# Altium PCB F103RBT6.PcbDoc
Units mil, origin at the board's own origin, x right, y up, seen from the top; angles counter-clockwise.
Board outline 1759 x 1760 mil, 2 copper layers (Top Layer, Bottom Layer); 21 components, 0 nets, 173 pads, 0 vias.
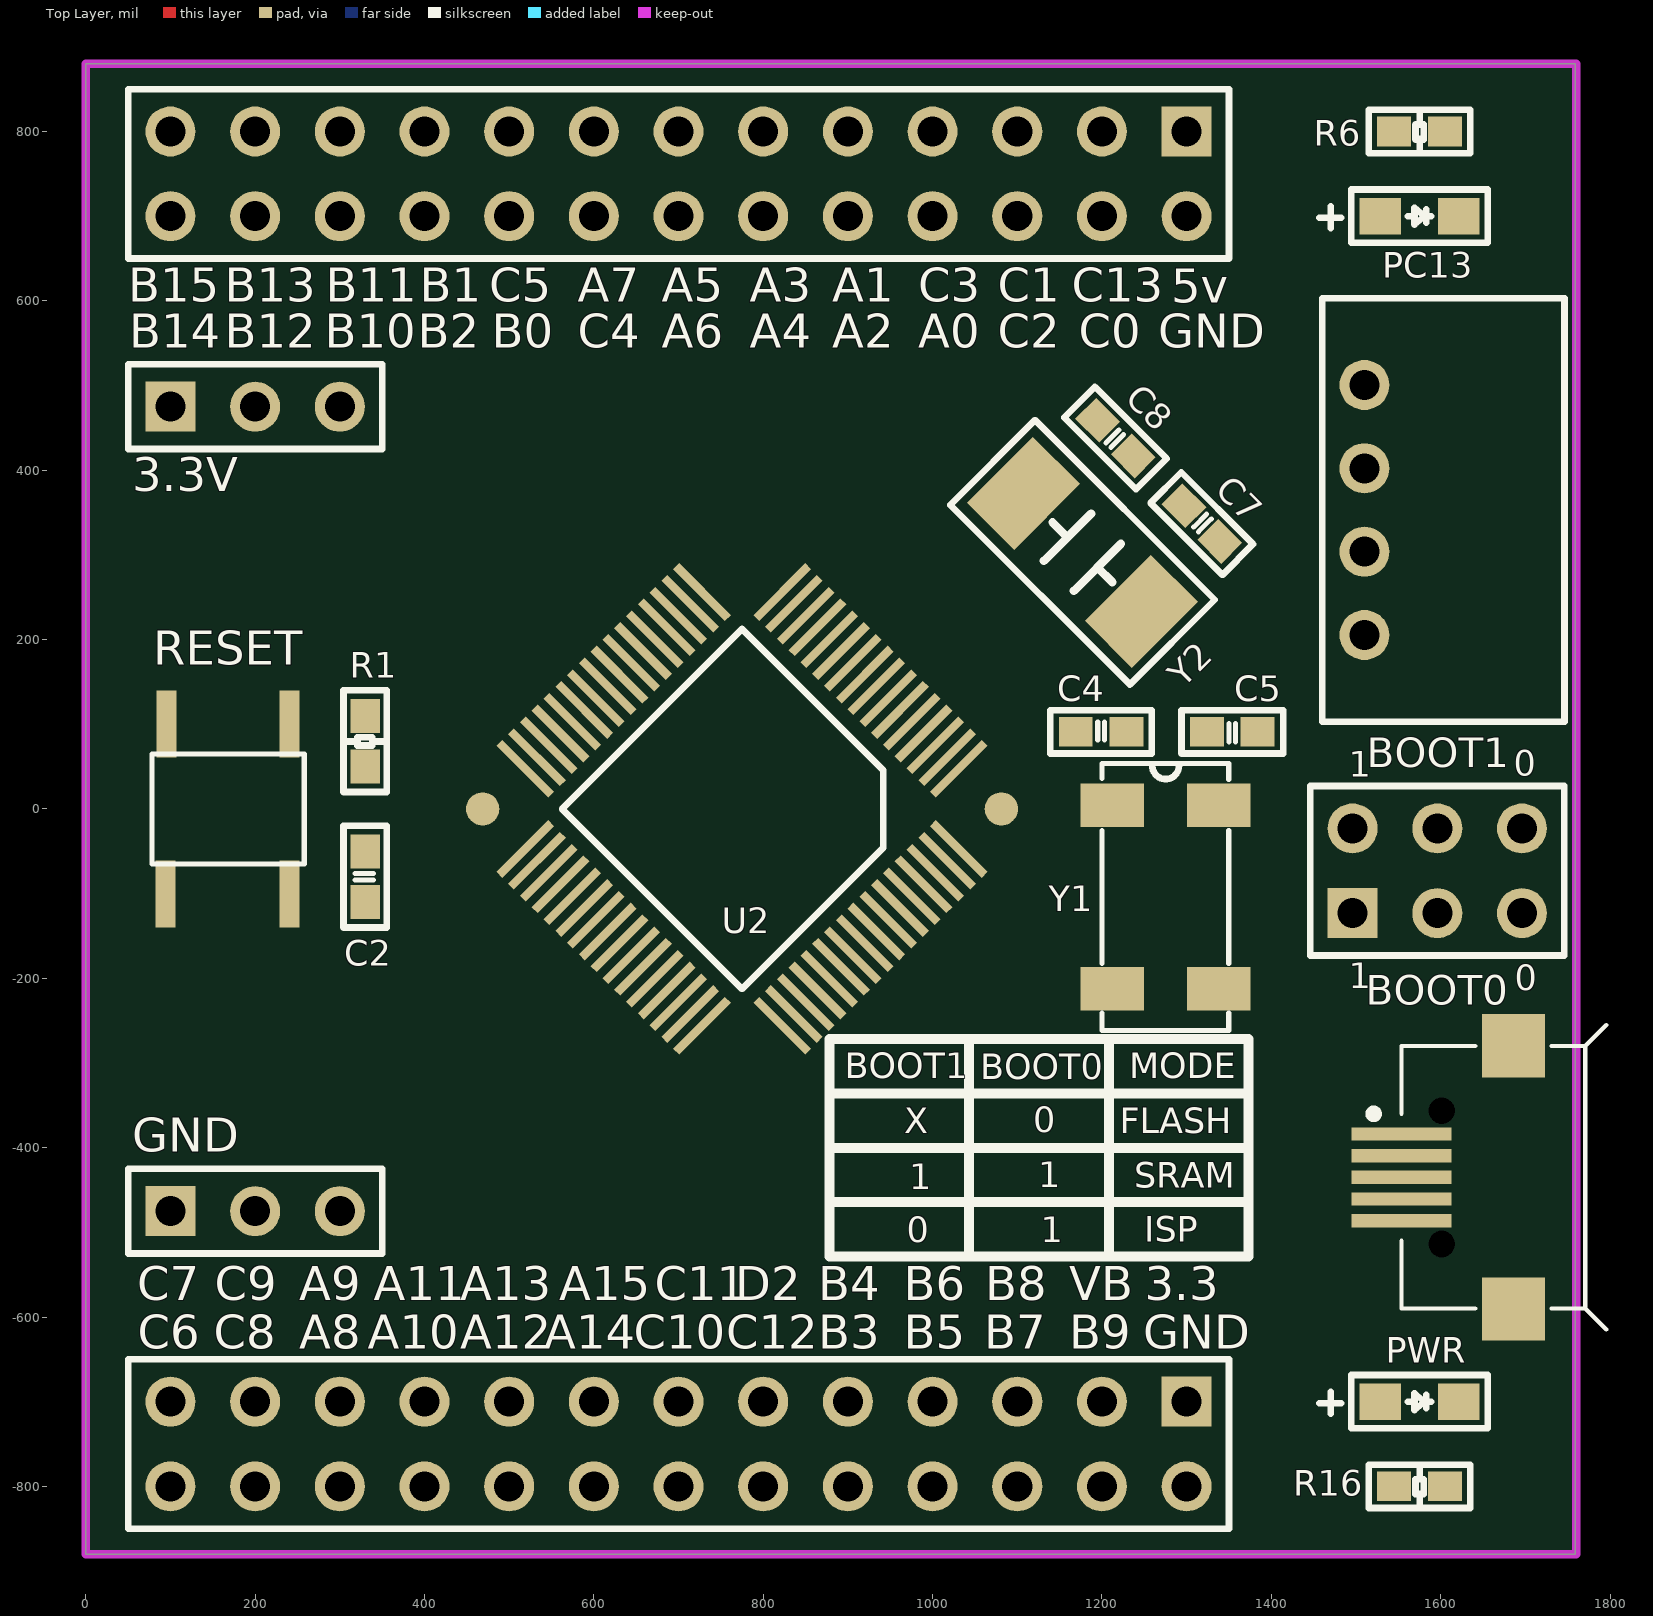
[diagram p0: Top Layer view]
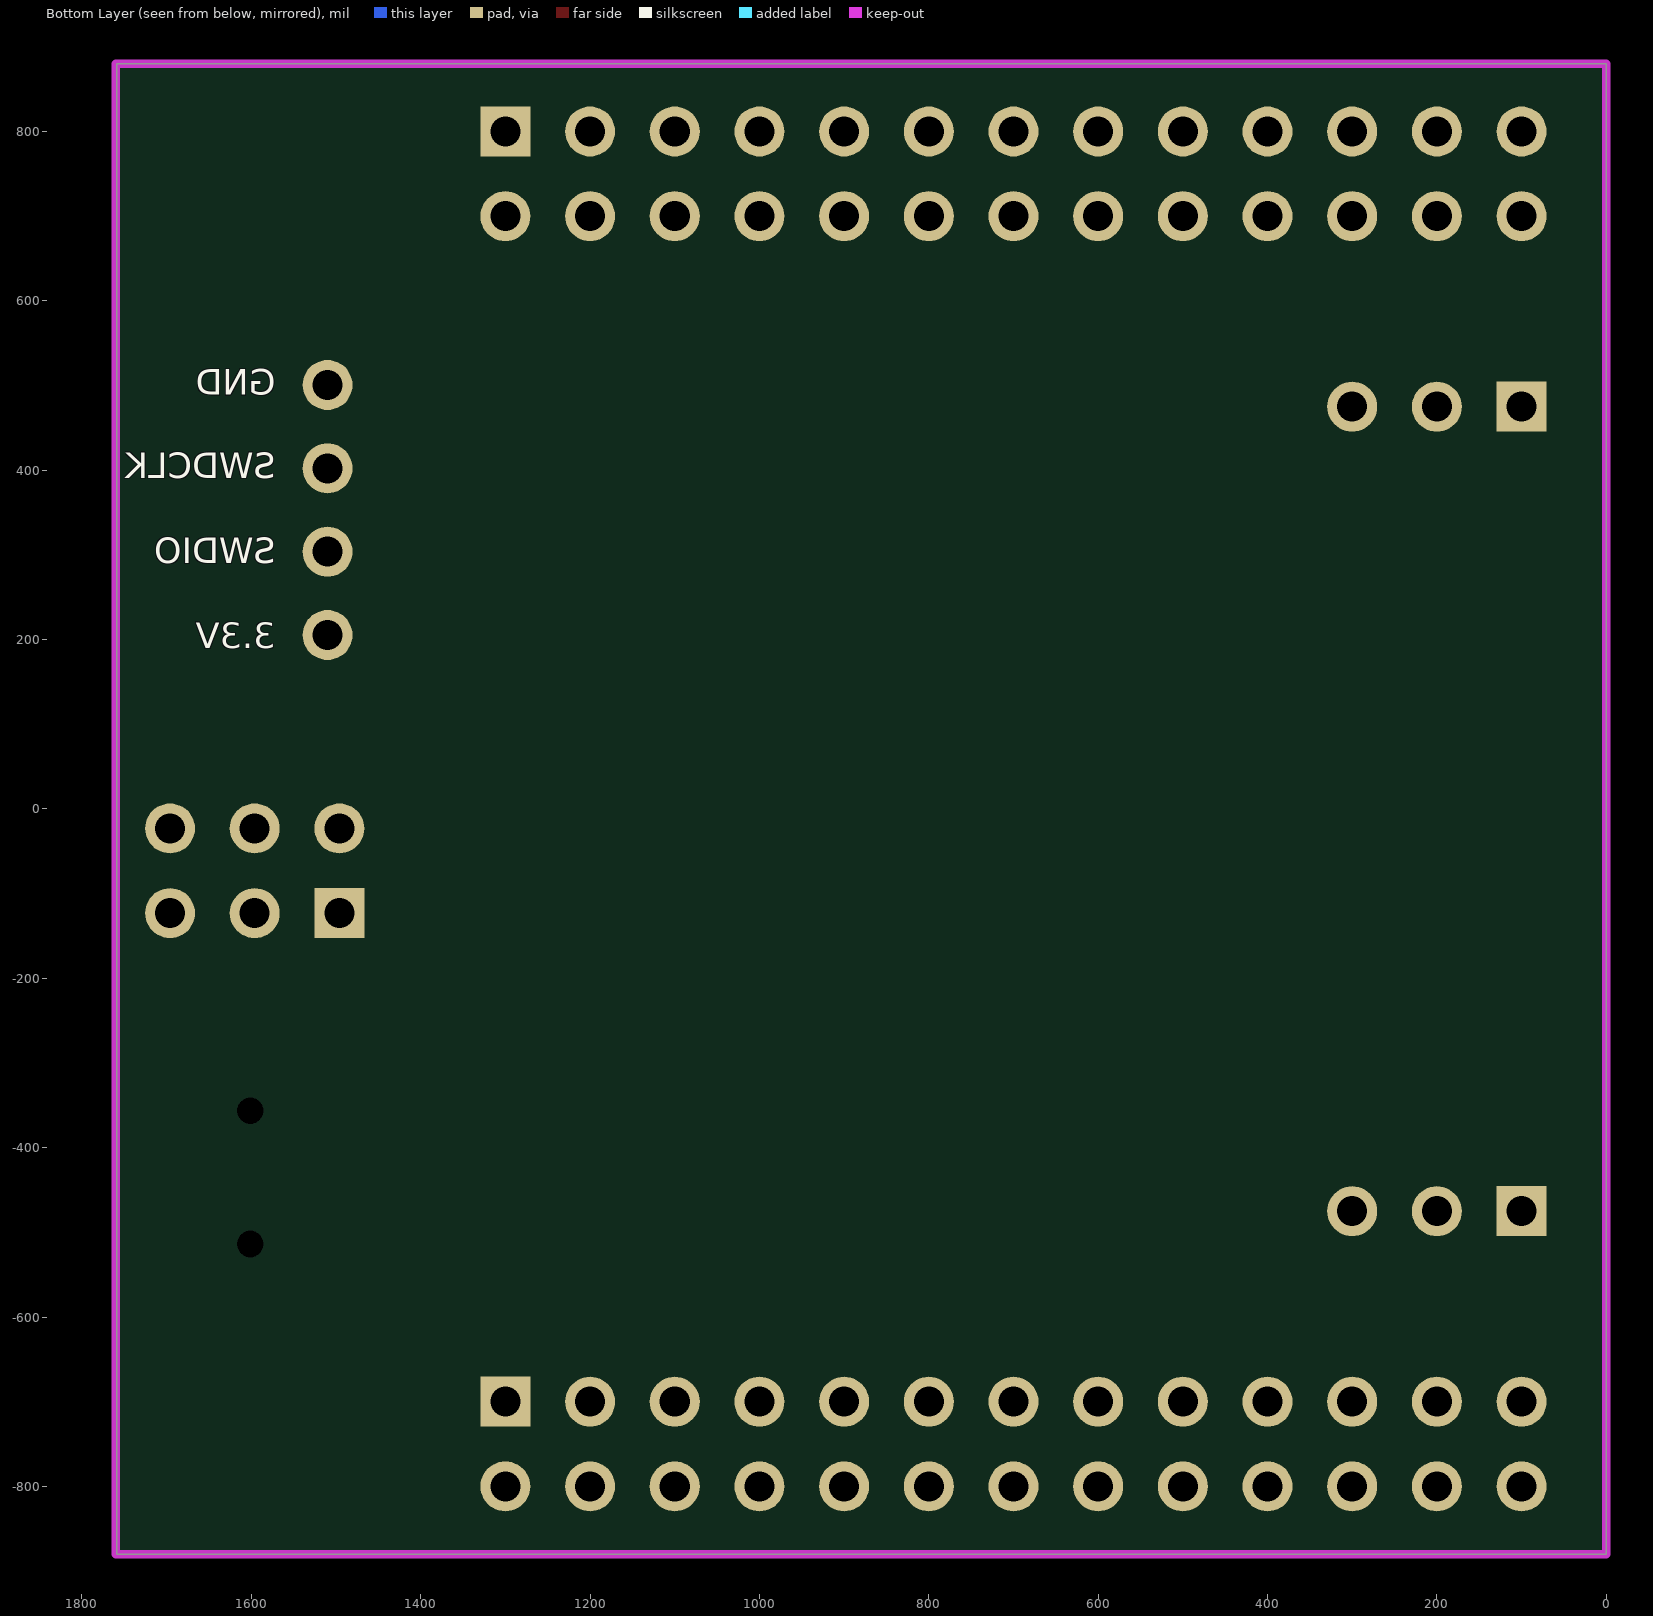
[diagram p1: Bottom Layer view, seen from below]

## Layer stack, top to bottom
Top Layer: signal copper 1.4
Dielectric: dielectric 12.6, FR-4, Dk 4.8
Bottom Layer: signal copper 1.4

## Board outline
1221,880 1759,880 1759,737 1759,-880 1067,-880 0,-880 0,-420 0,880 228,880

## Design rules (kind name [scope] priority, off if disabled: settings)
Clearance [All] p1: gap=8
DiffPairsRouting [All] p1: maxlimit=10 minlimit=10 mostfreqgap=10 maxuncoupledlength=5000
FabricationTestPointUsage TestPointUsage [All] p1: valid=0 allowmultiple=FALSE
FabricationTestpoint Testpoint [(IsPad And (OnTopLayer Or OnBottomLayer))] p1: side=3 testpointundercomponent=TRUE minsize=40 maxsize=100 preferedsize=60 minholesize=0 maxholesize=40 preferedholesize=32 testpointgrid=1 allowsidetop=TRUE allowsidebottom=TRUE usegrid=TRUE gridtolerance=0.01
PlaneConnect [All] p1: planeconnectstyle=Relief reliefexpansion=20 reliefentries=4 reliefconductorwidth=10 reliefairgap=3.94
PolygonConnect [All] p1: connectstyle=Relief reliefconductorwidth=27.56 reliefentries=4 polygonreliefangle="90 Angle" airgapwidth=10
RoutingVias [All] p1: holewidth=20 width=30 viastyle="Through Hole" minholewidth=20 minwidth=30 maxholewidth=20 maxwidth=30
SilkscreenOverComponentPads [All] p1: minsilkscreentomaskgap=10
SolderMaskExpansion [All] p1: expansion=4
Width [All] p1: maxlimit=20 minlimit=10 preferedwidth=20
23 further rules are at their usual default settings.

## Classes and differential pairs
component class CORE_BOARD: C2 C4 C5 C7 C8 PC13
differential pair NewDifferentialPair1: +"" -""

## Components (designator, comment, footprint, x,y, rotation, side; value= is the part's Value field where it differs from the comment)
3.3V "Comment" HDR1X3 100,475 r0 top
C2 "104" C0603 330,-80 r270 top
C4 "20p" c0603 1199,91 r180 top
C5 "20p" c0603 1354,91 r0 top
C7 "20p" C0603 1318,337 r135 top
C8 "20p" C0603 1216,438 r315 top
GND "Comment" HDR1X3 100,-475 r0 top
P1 "Header 3X2" HDR2X3 1496,-123 r0 top
P2 "MHDR2X13" HDR2X13 1300,-700 r180 top locked
P3 "MHDR2X13" HDR2X13 1300,800 r180 top locked
P5 "SWD" 5267 1510,353 r270 top
PC13 "LED" LED 1575,700 r180 top (schematic designator D1)
PWR "LED" LED 1575,-700 r180 top (schematic designator D2)
R1 "10K" R0603 330,80 r270 top
R6 "Res2" R0603 1575,800 r0 top
R16 "Res2" R0603 1575,-800 r0 top
RESET "Comment" KEY-SMT 168,0 r270 top
U2 "STM32F103RBT6" LQFP64 775,0 r225 top locked
Y1 "32.768K" MC-306 1275,-104 r270 top
Y2 "8MHz" 5032 1177,303 r135 top
? "Comment" Micro_USB 1620,-435 r90 top

## Footprints (in the part's own frame and the unit in brackets; to place one, negate y for a bottom-side part, rotate by r counter-clockwise, add the part's x,y. Pads: shape width x height; smd on the part's side, far side on the other; paste and mask are expansions set on the pad)
5032 [mm]
  rect 2x2.8 smd: 1(-2.5,0) 2(2.5,0)
  silkscreen extent -3.81,-1.8 3.81,1.8
5267 [mm]
  round 1.5 hole 0.9: 1(-3.75,0) 2(-1.25,0) 3(1.25,0) 4(3.75,0)
  silkscreen extent -6.35,-1.27 6.35,6
C0603 [mil]
  rect 40x35 smd: 1(-29.92,0) 2(29.92,0)
  silkscreen extent -60,-26 60,26
c0603 [mil]
  rect 40x35 smd: 1(-29.92,0) 2(29.92,0)
  silkscreen extent -60,-26 60,26
HDR1X3 [mm]
  rect 1.5x1.5 hole 0.9: 1(0,0)
  round 1.5 hole 0.9: 2(2.54,0) 3(5.08,0)
  silkscreen extent -1.27,-1.27 6.35,1.27
HDR2X3 [mm] "Connector; Header; 3x2 Position"
  rect 1.5x1.5 hole 0.9: 1(0,0)
  round 1.5 hole 0.9: 2(0,2.54) 3(2.54,0) 4(2.54,2.54) 5(5.08,0) 6(5.08,2.54)
  silkscreen extent -1.27,-1.27 6.35,3.81
HDR2X13 [mm] "Connector; Header; 13x2 Position"
  rect 1.5x1.5 hole 0.9: 1(0,0)
  round 1.5 hole 0.9: 2(0,2.54) 3(2.54,0) 4(2.54,2.54) 5(5.08,0) 6(5.08,2.54) 7(7.62,0) 8(7.62,2.54) 9(10.16,0) 10(10.16,2.54) 11(12.7,0) 12(12.7,2.54) 13(15.24,0) 14(15.24,2.54) 15(17.78,0) 16(17.78,2.54) 17(20.32,0) 18(20.32,2.54) 19(22.86,0) 20(22.86,2.54) 21(25.4,0) 22(25.4,2.54) 23(27.94,0) 24(27.94,2.54) 25(30.48,0) 26(30.48,2.54)
  silkscreen extent -1.27,-1.27 31.75,3.81
KEY-SMT [mm]
  rect 2x0.6 smd: 1(-2.55,-1.85) 1(2.55,-1.87) 2(-2.55,1.85) 2(2.55,1.85)
  silkscreen extent -1.65,-2.29 1.65,2.29
LED [mil]
  rect 49x43 smd: 1(46.26,0) 2(-46.26,0)
  silkscreen extent -81,-31 118,31
LQFP64 [mm]
  round 1 smd: 0(-5.5,5.5) 1(5.5,-5.5)
  rect 2.2x0.254 smd: 1(-5.45,3.75) 2(-5.45,3.25) 3(-5.45,2.75) 4(-5.45,2.25) 5(-5.45,1.75) 6(-5.45,1.25) 7(-5.45,0.75) 8(-5.45,0.25) 9(-5.45,-0.25) 10(-5.45,-0.75) 11(-5.45,-1.25) 12(-5.45,-1.75) 13(-5.45,-2.25) 14(-5.45,-2.75) 15(-5.45,-3.25) 16(-5.45,-3.75) 33(5.45,-3.75) 34(5.45,-3.25) 35(5.45,-2.75) 36(5.45,-2.25) 37(5.45,-1.75) 38(5.45,-1.25) 39(5.45,-0.75) 40(5.45,-0.25) 41(5.45,0.25) 42(5.45,0.75) 43(5.45,1.25) 44(5.45,1.75) 45(5.45,2.25) 46(5.45,2.75) 47(5.45,3.25) 48(5.45,3.75)
  rect 0.254x2.2 smd: 17(-3.75,-5.45) 18(-3.25,-5.45) 19(-2.75,-5.45) 20(-2.25,-5.45) 21(-1.75,-5.45) 22(-1.25,-5.45) 23(-0.75,-5.45) 24(-0.25,-5.45) 25(0.25,-5.45) 26(0.75,-5.45) 27(1.25,-5.45) 28(1.75,-5.45) 29(2.25,-5.45) 30(2.75,-5.45) 31(3.25,-5.45) 32(3.75,-5.45) 49(3.75,5.45) 50(3.25,5.45) 51(2.75,5.45) 52(2.25,5.45) 53(1.75,5.45) 54(1.25,5.45) 55(0.75,5.45) 56(0.25,5.45) 57(-0.25,5.45) 58(-0.75,5.45) 59(-1.25,5.45) 60(-1.75,5.45) 61(-2.25,5.45) 62(-2.75,5.45) 63(-3.25,5.45) 64(-3.75,5.45)
  silkscreen extent -3.81,-3.81 3.81,3.81
MC-306 [mm]
  rect 1.3x1.9 smd: 1(-2.75,-1.6) 2(2.75,-1.6) 3(2.75,1.6) 4(-2.75,1.6)
  silkscreen extent -4,-1.9 4,1.9
Micro_USB [mm]
  rect 0.4x3 smd: 1(1.3,1.679) 2(0.65,1.679) 3(0,1.679) 4(-0.65,1.679) 5(-1.3,1.679)
  round 0 hole 0.8 unplated: MH1(2,0.471) MH2(-2,0.471)
  rect 1.9x1.9 smd: ""(-3.95,-1.679) ""(3.95,-1.679)
  silkscreen extent -4.57,-4.46 4.57,2.64
R0603 [mil]
  rect 40x35 smd: 1(-29.92,0) 2(29.92,0)
  silkscreen extent -60,-26 60,26

## Part data
P1: "Header, 3-Pin, Dual row"
P2 P3: "Header, 13-Pin, Dual row"
P5: library part "Header 5", "Header, 5-Pin"
R6 R16: "Resistor"
Y1 Y2: library part XTAL, "Crystal Oscillat"

## Nets (pads, with @x,y where several pads share a name; then routed paths per layer and width w, separated by ;. In a path a pad name is that pad's centre, name@x,y a point inside that pad or via, vN(x,y) a via of type N, cw(c..) or ccw(c..) an arc to the next point about the centre after c; other vN are vias at no path point)
pads on no net: 3.3V.1 3.3V.2 3.3V.3 ?. ?.1 ?.2 ?.3 ?.4 ?.5 ?.MH1 ?.MH2 C2.1 C2.2 C4.1 C4.2 C5.1 C5.2 C7.1 C7.2 C8.1 C8.2 GND.1 GND.2 GND.3 P1.1 P1.2 P1.3 P1.4 P1.5 P1.6 P2.1 P2.2 P2.3 P2.4 P2.5 P2.6 P2.7 P2.8 P2.9 P2.10 P2.11 P2.12 P2.13 P2.14 P2.15 P2.16 P2.17 P2.18 P2.19 P2.20 P2.21 P2.22 P2.23 P2.24 P2.25 P2.26 P3.1 P3.2 P3.3 P3.4 P3.5 P3.6 P3.7 P3.8 P3.9 P3.10 P3.11 P3.12 P3.13 P3.14 P3.15 P3.16 P3.17 P3.18 P3.19 P3.20 P3.21 P3.22 P3.23 P3.24 P3.25 P3.26 P5.1 P5.2 P5.3 P5.4 PC13.1 PC13.2 PWR.1 PWR.2 R1.1 R1.2 R6.1 R6.2 R16.1 R16.2 RESET.1 RESET.2 U2.0 U2.1 U2.2 U2.3 U2.4 U2.5 U2.6 U2.7 U2.8 U2.9 U2.10 U2.11 U2.12 U2.13 U2.14 U2.15 U2.16 U2.17 U2.18 U2.19 U2.20 U2.21 U2.22 U2.23 U2.24 U2.25 U2.26 U2.27 U2.28 U2.29 U2.30 U2.31 U2.32 U2.33 U2.34 U2.35 U2.36 U2.37 U2.38 U2.39 U2.40 U2.41 U2.42 U2.43 U2.44 U2.45 U2.46 U2.47 U2.48 U2.49 U2.50 U2.51 U2.52 U2.53 U2.54 U2.55 U2.56 U2.57 U2.58 U2.59 U2.60 U2.61 U2.62 U2.63 U2.64 Y1.1 Y1.2 Y1.3 Y1.4 Y2.1 Y2.2

## Keep-outs
Keep-Out Layer:
  lines w10: 0,-880 1760,-880 1760,880 0,880 0,-880

## Silkscreen, mask and mechanical layers (free items; w line width, h text height)
Top Overlay:
  lines w11.81: 878.25,-464.44 1373.25,-464.44 ; 878.25,-400.19 1373.25,-400.19 ; 878.25,-335.94 1373.25,-335.94 ; 999.25,-271.69 1048.25,-271.69 ; 1043.25,-528.69 1043.25,-271.69 ; 1127.25,-271.69 1237.25,-271.69 ; 1208.25,-528.69 1208.25,-271.69 ; 878.25,-528.69 878.25,-271.69 1373.25,-271.69 1373.25,-528.69 878.25,-528.69
  text "B15" at 50.25,598.81 h40
  text "B13" at 164.25,598.81 h40
  text "B11" at 283.25,598.81 h40
  text "B1" at 394.25,598.81 h40
  text "C5" at 476.25,598.81 h40
  text "A7" at 581.25,598.81 h40
  text "A5" at 680.25,598.81 h40
  text "A3" at 784.25,598.81 h40
  text "A1" at 881.25,598.81 h40
  text "C3" at 983.25,598.81 h40
  text "C1" at 1077.25,598.81 h40
  text "C13" at 1164.25,598.81 h40
  text "5v" at 1281.6,597.81 h40
  text "B14" at 51.25,544.81 h40
  text "B12" at 164.25,544.81 h40
  text "B10" at 282.25,544.81 h40
  text "B2" at 392.25,544.81 h40
  text "B0" at 479.25,544.81 h40
  text "C4" at 581.25,544.81 h40
  text "A6" at 680.25,544.81 h40
  text "A4" at 784.25,544.81 h40
  text "A2" at 881.25,544.81 h40
  text "A0" at 983.25,544.81 h40
  text "C2" at 1077.25,544.81 h40
  text "C0" at 1172.6,544.81 h40
  text "GND" at 1266.6,544.81 h40
  text "BOOT1" at 1513,49 h35
  text "0" at 1686.6,39.03 h30
  text "1" at 1491.6,38.03 h30
  text "1" at 1491.6,-211.97 h30
  text "0" at 1687.6,-213.97 h30
  text "BOOT0" at 1511.6,-230.97 h35
  text "BOOT1" at 896.25,-318.19 h30
  text "MODE" at 1232.25,-318.19 h30
  text "BOOT0" at 1056.25,-319.19 h30
  text "0" at 1118.6,-381.97 h30
  text "X" at 966.6,-382.97 h30
  text "FLASH" at 1221.25,-383.19 h30
  text "1" at 1124.6,-446.97 h30
  text "SRAM" at 1238.25,-447.19 h30
  text "1" at 972.6,-448.97 h30
  text "ISP" at 1250.25,-511.19 h30
  text "0" at 969.6,-511.97 h30
  text "1" at 1127.6,-511.97 h30
  text "C7" at 61,-580 h40
  text "C9" at 152.25,-580 h40
  text "A9" at 252.25,-580 h40
  text "A11" at 340,-580 h40
  text "A13" at 442.25,-580 h40
  text "A15" at 559.25,-580 h40
  text "C11" at 671.89,-580 h40
  text "D2" at 767.25,-580 h40
  text "B4" at 865,-580 h40
  text "B6" at 966,-580 h40
  text "B8" at 1062.25,-580 h40
  text "VB" at 1161.25,-580 h40
  text "3.3" at 1250.6,-580 h40
  text "C6" at 61.25,-637.19 h40
  text "C8" at 151.25,-637.19 h40
  text "A8" at 252.25,-637.19 h40
  text "A10" at 333.25,-637.19 h40
  text "A12" at 442.25,-637.19 h40
  text "A14" at 541.6,-637.19 h40
  text "C10" at 647.25,-637.19 h40
  text "C12" at 756.25,-637.19 h40
  text "B3" at 865.25,-637.19 h40
  text "B5" at 966.25,-637.19 h40
  text "B7" at 1061.25,-637.19 h40
  text "B9" at 1161.25,-637.19 h40
  text "GND" at 1248.6,-637.19 h40
Bottom Overlay:
  text "GND" at 1571,489 h30
  text "SWDCLK" at 1571,390.67 h30
  text "SWDIO" at 1571,290.33 h30
  text "3.3V" at 1571,190 h30

## Dimensions
1300,800 to 1760,880 on Top Overlay
100,800 to 100,-800 on Top Overlay
100,700 to 100,-700 on Top Overlay
100,800 to 0,880 on Top Overlay
0,880 to 1760,880 on Top Overlay